# Altium PCB NU-SYNTHS_MIDICV_PANEL_8HP.PcbDoc
Units mm, origin at the board's own origin, x right, y up, seen from the top; angles counter-clockwise.
Board outline 40.3 x 128.5 mm, 2 copper layers (Top Layer, Bottom Layer), stack 1.55 mm thick; 91 components, 51 nets, 20 pads, 0 vias.
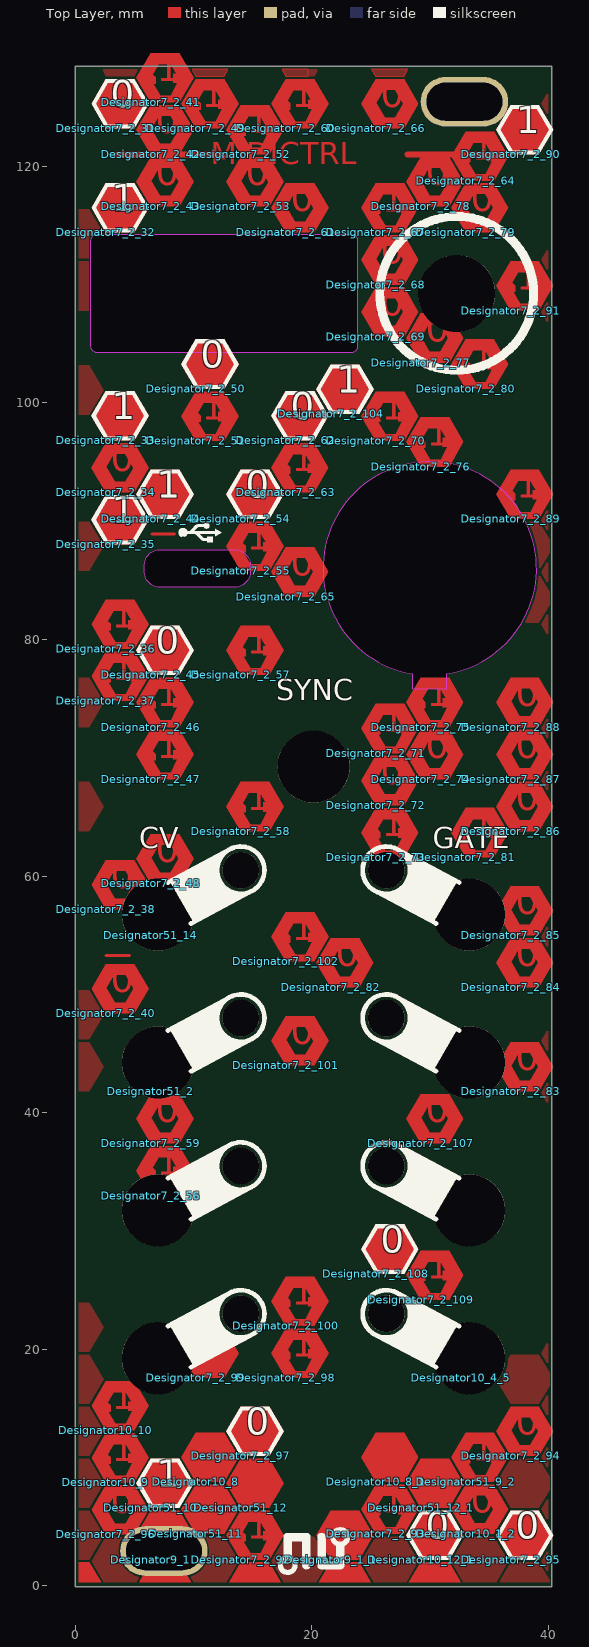
[diagram p0: Top Layer view]
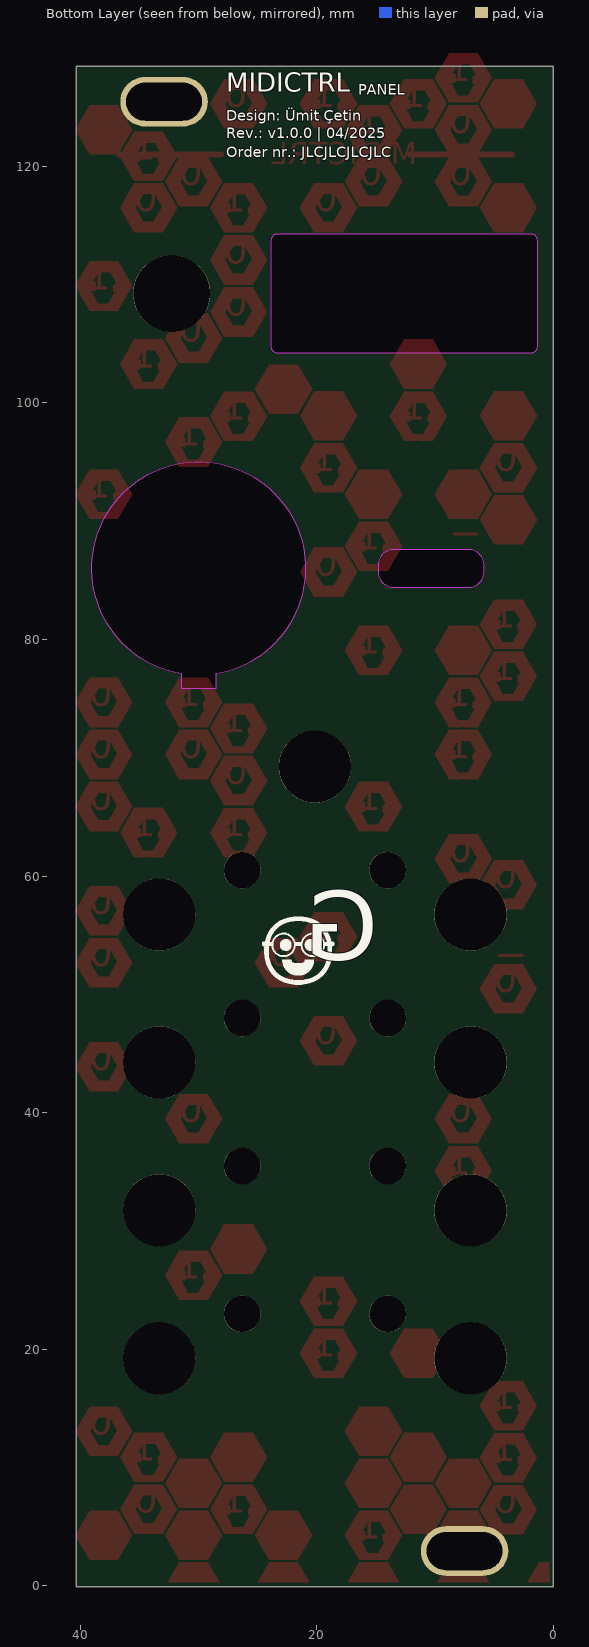
[diagram p1: Bottom Layer view, seen from below]

## Layer stack, top to bottom
Top Solder: solder mask 0.0127, Solder Resist, Dk 3.5
Top Layer: signal copper 0.025
Dielectric 1: dielectric 1.5, FR-4, Dk 4.8
Bottom Layer: signal copper 0.025
Bottom Solder: solder mask 0.0127, Solder Resist, Dk 3.5

## Board outline
0,-0.05 40.3,-0.05 40.3,128.45 0,128.45
cut-out: 28.512,75.85 31.412,75.85 31.412,77.09 ccw(c29.975,86) 28.512,77.094
cut-out: 7.135,84.42 cw(c7.135,85.7) 5.855,85.7 5.855,86.3 cw(c7.135,86.3) 7.135,87.58 13.515,87.58 cw(c13.515,86.3) 14.795,86.3 14.795,85.7 cw(c13.515,85.7) 13.515,84.42
cut-out: 1.835,104.246 cw(c1.835,104.746) 1.335,104.746 1.335,113.746 cw(c1.835,113.746) 1.835,114.246 23.365,114.246 cw(c23.365,113.746) 23.865,113.746 23.865,104.746 cw(c23.365,104.746) 23.365,104.246

## Design rules (kind name [scope] priority, off if disabled: settings)
BoardOutlineClearance [All] p1: gap=0.2 ignorepadtopadclearanceinfootprint=FALSE
Clearance [All] p1: gap=0.127 ignorepadtopadclearanceinfootprint=FALSE except(0.25: Arc-Hole Track-Hole SMDPad-Hole THPad-Hole Via-Hole Fill-Hole Poly-Hole Region-Hole Text-Hole)
ComponentClearance [All] p1: gap=0.127 collisioncheckmode=3 verticalgap=0.127 showdistances=TRUE
DiffPairsRouting [All] p1: maxlimit=0.254 minlimit=0.127 mostfreqgap=0.127 toplayer_minwidth=0.127 toplayer_maxwidth=25.4 toplayer_prefwidth=0.127 bottomlayer_minwidth=0.127 bottomlayer_maxwidth=25.4 bottomlayer_prefwidth=0.127 maxuncoupledlength=12.7
Height [All] p1: minheight=0 maxheight=1816.048 prefheight=12.7
HoleSize [All] p1: absolutevalues=TRUE maxlimit=6.3 minlimit=0.3 maxpercent=80.000 minpercent=20.000
HoleToHoleClearance [All] p1: gap=0.25 allowstackedmicrovias=FALSE
MinimumAnnularRing [All] p1: minimumring=0.076
MinimumSolderMaskSliver [All] p1: minsoldermaskwidth=0
PlaneClearance [All] p1: clearance=0.127
PlaneConnect PlaneConnectPowerPads [InPadClass('PowerPads')] p1: planeconnectstyle=Direct reliefexpansion=0.508 reliefentries=4 reliefconductorwidth=0.254 reliefairgap=0.254
PlaneConnect [All] p2: pad.planeconnectstyle=Relief pad.reliefexpansion=0.3 pad.reliefentries=4 pad.reliefconductorwidth=0.127 pad.reliefairgap=0.127 via.planeconnectstyle=Direct via.reliefexpansion=0.3 via.reliefentries=4 via.reliefconductorwidth=0.127 via.reliefairgap=0.127
PolygonConnect PolygonConnectPowerPads [All vs (InPadClass('PowerPads'))] p1: connectstyle=Direct reliefconductorwidth=0.254 reliefentries=4 polygonreliefangle="90 Angle" airgapwidth=0.254
PolygonConnect [All] p2: thpad.connectstyle=Relief thpad.reliefconductorwidth=0.2 thpad.reliefentries=4 thpad.polygonreliefangle="90 Angle" thpad.airgapwidth=0.127 smdpad.connectstyle=Relief smdpad.reliefconductorwidth=0.2 smdpad.reliefentries=4 smdpad.polygonreliefangle="90 Angle" smdpad.airgapwidth=0.127 via.connectstyle=Direct via.reliefconductorwidth=0.127 via.reliefentries=4 via.polygonreliefangle="90 Angle" via.airgapwidth=0.127
RoutingVias [All] p1: holewidth=0.3 width=0.6 viastyle="Through Hole" minholewidth=0.3 minwidth=0.6 maxholewidth=0.6 maxwidth=6.6
SilkToSilkClearance [All] p1: silktosilkclearance=0
SilkToSolderMaskClearance [IsPad] p1: minsilkscreentomaskgap=0.127 clearancetoexposedcopper=TRUE
SolderMaskExpansion [All] p1: expansion=0.075 istentingtop=FALSE
Width [All] p1: maxlimit=25.4 minlimit=0.127 preferedwidth=0.127 minimp=50.000000 maximp=50.000000 favimp=50.000000
20 further rules are at their usual default settings.

## Components (designator, comment, footprint, x,y, rotation, side; value= is the part's Value field where it differs from the comment)
Designator7_2_31 "Comment" "Copper - silk 0 - OUTline" 2.6,123.2 r0 top
Designator7_2_32 "Comment" "Copper - silk 1 - OUTline" 2.6,114.4 r0 top
Designator7_2_33 "Comment" "Copper - silk 1 - OUTline" 2.59,96.83 r0 top
Designator7_2_34 "Comment" "BINARY 0" 2.59,92.43 r0 top
Designator7_2_35 "Comment" "Copper - silk 1 - OUTline" 2.59,88.03 r0 top
Designator7_2_36 "Comment" "BINARY 1" 2.6,79.2 r0 top
Designator7_2_37 "Comment" "BINARY 1" 2.6,74.8 r0 top
Designator7_2_38 "Comment" "BINARY 0" 2.6,57.2 r0 top
Designator7_2_40 "Comment" "BINARY 0" 2.6,48.4 r0 top
Designator7_2_41 "Comment" "BINARY 1" 6.4,125.401 r0 top
Designator7_2_42 "Comment" "BINARY 0" 6.4,121.001 r0 top
Designator7_2_43 "Comment" "BINARY 0" 6.4,116.601 r0 top
Designator7_2_44 "Comment" "Copper - silk 1 - OUTline" 6.4,90.201 r0 top
Designator7_2_45 "Comment" "Copper - silk 0 - OUTline" 6.4,77.001 r0 top
Designator7_2_46 "Comment" "BINARY 1" 6.4,72.601 r0 top
Designator7_2_47 "Comment" "BINARY 1" 6.4,68.201 r0 top
Designator7_2_48 "Comment" "BINARY 0" 6.4,59.401 r0 top
Designator7_2_49 "Comment" "BINARY 1" 10.2,123.201 r0 top
Designator7_2_50 "Comment" "Copper - silk 0 - OUTline" 10.2,101.201 r0 top
Designator7_2_51 "Comment" "BINARY 1" 10.2,96.801 r0 top
Designator7_2_52 "Comment" "BINARY 1" 14,121.001 r0 top
Designator7_2_53 "Comment" "BINARY 0" 14,116.601 r0 top
Designator7_2_54 "Comment" "Copper - silk 0 - OUTline" 14,90.2 r0 top
Designator7_2_55 "Comment" "BINARY 1" 14,85.8 r0 top
Designator7_2_56 "Comment" "BINARY 1" 6.4,33.001 r0 top
Designator7_2_57 "Comment" "BINARY 1" 14,77.001 r0 top
Designator7_2_58 "Comment" "BINARY 1" 14,63.801 r0 top
Designator7_2_59 "Comment" "BINARY 0" 6.4,37.401 r0 top
Designator7_2_60 "Comment" "BINARY 1" 17.8,123.199 r0 top
Designator7_2_61 "Comment" "BINARY 0" 17.8,114.399 r0 top
Designator7_2_62 "Comment" "Copper - silk 0 - OUTline" 17.79,96.829 r0 top
Designator7_2_63 "Comment" "BINARY 1" 17.79,92.429 r0 top
Designator7_2_64 "Comment" "BINARY 1" 33.011,118.771 r0 top
Designator7_2_65 "Comment" "BINARY 0" 17.79,83.629 r0 top
Designator7_2_66 "Comment" "BINARY 0" 25.4,123.199 r0 top
Designator7_2_67 "Comment" "BINARY 1" 25.4,114.399 r0 top
Designator7_2_68 "Comment" "BINARY 0" 25.4,109.999 r0 top
Designator7_2_69 "Comment" "BINARY 0" 25.4,105.599 r0 top
Designator7_2_70 "Comment" "BINARY 1" 25.4,96.799 r0 top
Designator7_2_71 "Comment" "BINARY 1" 25.4,70.399 r0 top
Designator7_2_72 "Comment" "BINARY 0" 25.4,65.999 r0 top
Designator7_2_73 "Comment" "BINARY 1" 25.4,61.599 r0 top
Designator7_2_74 "Comment" "BINARY 0" 29.2,68.199 r0 top
Designator7_2_75 "Comment" "BINARY 1" 29.2,72.599 r0 top
Designator7_2_76 "Comment" "BINARY 1" 29.2,94.619 r0 top
Designator7_2_77 "Comment" "BINARY 0" 29.2,103.401 r0 top
Designator7_2_78 "Comment" "BINARY 0" 29.2,116.599 r0 top
Designator7_2_79 "Comment" "BINARY 0" 33,114.399 r0 top
Designator7_2_80 "Comment" "BINARY 1" 33,101.201 r0 top
Designator7_2_81 "Comment" "BINARY 1" 33,61.6 r0 top
Designator7_2_82 "Comment" "BINARY 0" 21.6,50.6 r0 top
Designator7_2_83 "Comment" "BINARY 0" 36.8,41.8 r0 top
Designator7_2_84 "Comment" "BINARY 0" 36.8,50.6 r0 top
Designator7_2_85 "Comment" "BINARY 0" 36.8,55 r0 top
Designator7_2_86 "Comment" "BINARY 0" 36.8,63.8 r0 top
Designator7_2_87 "Comment" "BINARY 0" 36.8,68.2 r0 top
Designator7_2_88 "Comment" "BINARY 0" 36.8,72.6 r0 top
Designator7_2_89 "Comment" "BINARY 1" 36.8,90.2 r0 top
Designator7_2_90 "Comment" "Copper - silk 1 - OUTline" 36.8,121 r0 top
Designator7_2_91 "Comment" "BINARY 1" 36.8,107.8 r0 top
Designator7_2_92 "Comment" "BINARY 1" 14,2.2 r0 top
Designator7_2_93 "Comment" "BINARY 1" 25.4,4.4 r0 top
Designator7_2_94 "Comment" "BINARY 0" 36.8,10.999 r0 top
Designator7_2_95 "Comment" "Copper - silk 0 - OUTline" 36.8,2.199 r0 top
Designator7_2_96 "Comment" "BINARY 0" 2.6,4.357 r0 top
Designator7_2_97 "Comment" "Copper - silk 0 - OUTline" 14,11.001 r0 top
Designator7_2_98 "Comment" "BINARY 1" 17.8,17.6 r0 top
Designator7_2_99 "Comment" Copper 10.2,17.6 r0 top
Designator7_2_100 "Comment" "BINARY 1" 17.8,22 r0 top
Designator7_2_101 "Comment" "BINARY 0" 17.8,44 r0 top
Designator7_2_102 "Comment" "BINARY 1" 17.8,52.8 r0 top
Designator7_2_104 "Comment" "Copper - silk 1 - OUTline" 21.605,99.065 r0 top
Designator7_2_107 "Comment" "BINARY 0" 29.2,37.401 r0 top
Designator7_2_108 "Comment" "Copper - silk 0 - OUTline" 25.4,26.4 r0 top
Designator7_2_109 "Comment" "BINARY 1" 29.2,24.199 r0 top
Designator9_1 "Comment" Copper 6.4,2.2 r0 top
Designator9_1_1 "Comment" Copper 21.6,2.2 r0 top
Designator10_1_2 "Comment" "BINARY 0" 33,4.399 r0 top
Designator10_4_5 "Comment" Copper 32.6,17.6 r0 top
Designator10_8 "Comment" Copper 10.2,8.8 r0 top
Designator10_8_1 "Comment" Copper 25.4,8.8 r0 top
Designator10_9 "Comment" "BINARY 1" 2.6,8.756 r0 top
Designator10_10 "Comment" "BINARY 1" 2.6,13.156 r0 top
Designator10_12_1 "Comment" "Copper - silk 0 - OUTline" 29.2,2.2 r0 top
Designator51_2 "Comment" Copper 6.4,41.8 r0 top
Designator51_9_2 "Comment" "BINARY 1" 33,8.799 r0 top
Designator51_10 "Comment" "Copper - silk 1 - OUTline" 6.4,6.6 r0 top
Designator51_11 "Comment" Copper 10.2,4.4 r0 top
Designator51_12 "Comment" Copper 14,6.6 r0 top
Designator51_12_1 "Comment" Copper 29.2,6.6 r0 top
Designator51_14 "Comment" Copper 6.4,55 r0 top

## Footprints (in the part's own frame and the unit in brackets; to place one, negate y for a bottom-side part, rotate by r counter-clockwise, add the part's x,y. Pads: shape width x height; smd on the part's side, far side on the other; paste and mask are expansions set on the pad)
"BINARY 0" [mm]
  Top Layer region: 1.2,4.156 0,4.156 -1.214,2.077 0,2.077
  Top Layer region: 1.3,0 0,0 -1.214,2.078 0.084,2.077
  Top Layer region: 1.2,0 2.4,0 3.614,2.078 2.35,2.1 1.2,0.125
  Top Layer region: 1.2,4.156 2.4,4.156 3.614,2.077 2.339,2.079 1.2,4.025
  Top Layer region: 0.641,3.262 1.684,3.262 1.684,4.154 0.651,4.154
  Top Layer region: 0.75,0.9 1.65,0.9 1.617,0.153 0.856,0.153 0.846,0.143
"BINARY 1" [mm]
  Top Layer region: 0.725,0 1.875,0 1.875,0.575 0.725,0.575
  Top Layer region: 0.641,3.225 1.684,3.225 1.684,4.154 0.651,4.154
  Top Layer region: 1.2,4.156 2.4,4.156 3.614,2.077 2.339,2.079 1.2,4.025
  Top Layer region: 1.409,0 2.4,0 3.614,2.078 2.455,2.078
  Top Layer region: 1.14,0 0,0 -1.214,2.078 -0.076,2.077
  Top Layer region: 1.2,4.156 0,4.156 -1.214,2.077 -0.016,2.079
  Top Layer region: -0.611,2.35 0.161,2.35 0.4,2.111 0.4,1.583 -0.6,1.583 -0.609,1.573
  Top Layer region: 1.889,2.425 2.661,2.425 2.9,2.186 2.9,1.658 1.9,1.658 1.891,1.648
Copper [mm]
  Top Layer region: 0,0 2.4,0 3.614,2.078 2.4,4.157 0,4.157 -1.214,2.078
"Copper - silk 0 - OUTline" [mm]
  Top Layer region: 0,0 2.4,0 3.614,2.078 2.4,4.157 0,4.157 -1.214,2.078
  silkscreen extent -1.21,0 3.61,4.16
"Copper - silk 1 - OUTline" [mm]
  Top Layer region: 0,0 2.4,0 3.614,2.078 2.4,4.157 0,4.157 -1.214,2.078
  silkscreen extent -1.21,0 3.61,4.16

## Free pads (board coordinates)
  round 6.1 hole 6.1 unplated: ""(7,19.25) ""(7,31.75) ""(7,44.25) ""(7,56.75) ""(20.15,69.25) ""(33.3,19.25) ""(33.3,31.75) ""(33.3,44.25) ""(33.3,56.75)
  oval 7.4x4.2 hole 3.2 slot 6.4 at 0 deg: ""(7.5,2.95) ""(32.9,125.45)
  round 3.1 hole 3.1 unplated: ""(14,23) ""(14,35.5) ""(14,48) ""(14,60.5) ""(26.3,23) ""(26.3,35.5) ""(26.3,48) ""(26.3,60.5)
  round 6.5 hole 6.5 unplated: ""(32.25,109.25)

## Nets (pads, with @x,y where several pads share a name; then routed paths per layer and width w, separated by ;. In a path a pad name is that pad's centre, name@x,y a point inside that pad or via, vN(x,y) a via of type N, cw(c..) or ccw(c..) an arc to the next point about the centre after c; other vN are vias at no path point)
+12V: 
-12V: 
CONN_VN12: 
CONN_VP12: 
GND: 
NetC1_1: 
NetC1_2: 
NetC2_1: 
NetC3_1: 
NetC3_2: 
NetC4_2: 
NetC5_1: 
NetC5_2: 
NetC6_1: 
NetC6_2: 
NetC7_2: 
NetC8_2: 
NetD2_1: 
NetD2_2: 
NetD4_1: 
NetD4_2: 
NetD6_1: 
NetD7_2: 
NetD8_2: 
NetD10_2: 
NetD11_1: 
NetQ1_1: 
NetQ1_3: 
NetQ2_1: 
NetQ3_1: 
NetQ4_1: 
NetQ7_1: 
NetQ7_3: 
NetQ8_1: 
NetR2_1: 
NetR3_1: 
NetR10_1: 
NetR12_1: 
NetR13_1: 
NetR14_1: 
NetR15_1: 
NetR15_2: 
NetR16_1: 
NetR17_1: 
NetR21_2: 
NetR21_3: 
NetR23_1: 
NetR23_2: 
NetR24_1: 
NetR24_2: 
NetR26_2: 
copper on no net: | length 21.1
  Top Layer w0.254: 2.6,53.3 4.6,53.3 ; 6.5,88.9 8.4,88.9
  Top Layer w0.5: 3.5,121 12.1,121 ; 28.1,121 36.7,121

## Polygon pours and split planes (outlines as drawn)
no net on Top Layer "NONET_L01_P109" (solid, pour order 109): 35.586,17.477 36.193,18.516 36.8,19.556 39.2,19.556 39.807,18.516 40.414,17.477 39.807,16.438 39.2,15.399 36.8,15.399
no net on Top Layer "NONET_L01_P100" (solid, pour order 100): 35.807,0.299 36.8,1.999 39.2,1.999 40.193,0.299
no net on Top Layer "NONET_L01_P099" (solid, pour order 99): 1.386,2.078 2.6,4.157 5,4.157 6.214,2.079 5.176,0.301 2.424,0.301
no net on Top Layer "NONET_L01_P098" (solid, pour order 98): 8.986,2.078 10.2,4.157 12.6,4.157 13.814,2.079 12.776,0.301 10.024,0.301
no net on Top Layer "NONET_L01_P097" (solid, pour order 97): 16.586,2.078 17.8,4.157 20.2,4.157 21.414,2.078 20.376,0.301 17.624,0.301
no net on Top Layer "NONET_L01_P096" (solid, pour order 96): 24.186,2.078 25.4,4.157 27.8,4.157 29.014,2.078 27.976,0.301 25.224,0.301
no net on Top Layer "NONET_L01_P095" (solid, pour order 95): 31.786,2.077 33,4.156 35.4,4.156 36.614,2.078 35.576,0.3 32.824,0.3
no net on Top Layer "NONET_L01_P094" (solid, pour order 94): 39.386,41.677 39.993,42.717 39.993,40.638
no net on Top Layer "NONET_L01_P092" (solid, pour order 92): 39.386,2.077 39.993,3.116 39.993,1.038
no net on Top Layer "NONET_L01_P091" (solid, pour order 91): 35.586,8.677 36.193,9.716 36.8,10.756 39.2,10.756 39.807,9.716 40.414,8.677 39.807,7.638 39.2,6.599 36.8,6.599
no net on Top Layer "NONET_L01_P090" (solid, pour order 90): 39.386,6.477 39.993,7.516 39.993,5.438
no net on Top Layer "NONET_L01_P088" (solid, pour order 88): 39.386,10.877 39.993,11.916 39.993,9.838
no net on Top Layer "NONET_L01_P086" (solid, pour order 86): 39.386,15.277 39.993,16.316 39.993,14.238
no net on Top Layer "NONET_L01_P084" (solid, pour order 84): 39.386,19.677 39.993,20.716 39.993,18.638
no net on Top Layer "NONET_L01_P075" (solid, pour order 75): 39.386,125.277 39.993,126.317 39.993,124.238
no net on Top Layer "NONET_L01_P069" (solid, pour order 69): 39.386,112.077 39.993,113.117 39.993,111.038
no net on Top Layer "NONET_L01_P067" (solid, pour order 67): 39.386,107.677 39.993,108.717 39.993,106.638
no net on Top Layer "NONET_L01_P059" (solid, pour order 59): 39.386,90.077 39.993,91.117 39.993,89.038
no net on Top Layer "NONET_L01_P058" (solid, pour order 58): 35.586,87.877 36.193,88.917 36.8,89.956 39.2,89.956 39.807,88.917 40.414,87.878 39.807,86.838 39.2,85.799 36.8,85.799
no net on Top Layer "NONET_L01_P057" (solid, pour order 57): 39.386,85.677 39.993,86.717 39.993,84.638
no net on Top Layer "NONET_L01_P056" (solid, pour order 56): 35.586,83.477 36.193,84.517 36.8,85.556 39.2,85.556 39.807,84.517 40.414,83.478 39.807,82.438 39.2,81.399 36.8,81.399
no net on Top Layer "NONET_L01_P055" (solid, pour order 55): 39.386,81.277 39.993,82.317 39.993,80.238
no net on Top Layer "NONET_L01_P051" (solid, pour order 51): 39.386,72.477 39.993,73.517 39.993,71.438
no net on Top Layer "NONET_L01_P049" (solid, pour order 49): 39.386,68.077 39.993,69.117 39.993,67.038
no net on Top Layer "NONET_L01_P043" (solid, pour order 43): 39.386,54.877 39.993,55.917 39.993,53.838
no net on Top Layer "NONET_L01_P039" (solid, pour order 39): 39.386,46.077 39.993,47.117 39.993,45.038
no net on Top Layer "NONET_L01_P037" (solid, pour order 37): 25.4,127.6 27.8,127.6 28.152,128.199 25.048,128.199
no net on Top Layer "NONET_L01_P036" (solid, pour order 36): 10.2,127.6 12.6,127.6 12.952,128.2 9.848,128.2
no net on Top Layer "NONET_L01_P034" (solid, pour order 34): 25.4,127.6 27.8,127.6 28.152,128.199 25.048,128.199
no net on Top Layer "NONET_L01_P033" (solid, pour order 33): 17.8,127.6 20.2,127.6 20.552,128.199 17.448,128.199
no net on Top Layer "NONET_L01_P031" (solid, pour order 31): 0.3,112.2 1.2,112.2 2.414,114.278 1.2,116.357 0.3,116.357
no net on Top Layer "NONET_L01_P029" (solid, pour order 29): 0.3,63.8 1.2,63.8 2.414,65.878 1.2,67.957 0.3,67.957
no net on Top Layer "NONET_L01_P027" (solid, pour order 27): 0.3,72.6 1.2,72.6 2.414,74.678 1.2,76.757 0.3,76.757
no net on Top Layer "NONET_L01_P024" (solid, pour order 24): 0.3,85.8 1.2,85.8 2.414,87.878 1.2,89.957 0.3,89.957
no net on Top Layer "NONET_L01_P021" (solid, pour order 21): 0.3,99 1.2,99 2.414,101.078 1.2,103.157 0.3,103.157
no net on Top Layer "NONET_L01_P017" (solid, pour order 17): 0.3,41.8 1.2,41.8 2.414,43.878 1.2,45.957 0.3,45.957
no net on Top Layer "NONET_L01_P016" (solid, pour order 16): 0.3,46.2 1.2,46.2 2.414,48.278 1.2,50.357 0.3,50.357
no net on Top Layer "NONET_L01_P014" (solid, pour order 14): 0.3,2.2 1.2,2.2 2.414,4.278 1.2,6.357 0.3,6.357
no net on Top Layer "NONET_L01_P013" (solid, pour order 13): 0.3,6.6 1.2,6.6 2.414,8.678 1.2,10.757 0.3,10.757
no net on Top Layer "NONET_L01_P012" (solid, pour order 12): 0.3,11 1.2,11 2.414,13.078 1.2,15.157 0.3,15.157
no net on Top Layer "NONET_L01_P011" (solid, pour order 11): 10.2,127.6 12.6,127.6 12.952,128.2 9.848,128.2
no net on Top Layer "NONET_L01_P010" (solid, pour order 10): 2.6,127.6 5,127.6 5.352,128.2 2.248,128.2
no net on Top Layer "NONET_L01_P006" (solid, pour order 6): 0.3,107.8 1.2,107.8 2.414,109.878 1.2,111.957 0.3,111.957
no net on Top Layer "NONET_L01_P003" (solid, pour order 3): 0.3,19.8 1.2,19.8 2.414,21.879 1.2,23.957 0.3,23.957
no net on Top Layer "NONET_L01_P001" (solid, pour order 1): 0.3,15.4 1.2,15.4 2.414,17.478 1.2,19.557 0.3,19.557
no net on Top Layer "NONET_L01_P000" (solid, pour order 0): 17.8,127.6 19.7,127.6 19.7,128.2 17.448,128.2
no net on Top Overlay "NONET_L-01_P-001" (solid): 32.235,47.008 29.575,48.525 28.2,49.225 28.2,47.15 26.325,45.775 27.863,45.038 30.26,43.584
no net on Top Overlay "NONET_L-01_P-001" (solid): 8.065,22.008 10.725,23.525 12.1,24.225 12.1,22.15 13.975,20.775 12.437,20.038 10.04,18.584
no net on Top Overlay "NONET_L-01_P-001" (solid): 8.065,59.508 10.725,61.025 12.1,61.725 12.1,59.65 13.975,58.275 12.437,57.538 10.04,56.084
no net on Top Overlay "NONET_L-01_P-001" (solid): 8.065,34.508 10.725,36.025 12.1,36.725 12.1,34.65 13.975,33.275 12.437,32.538 10.04,31.084
no net on Top Overlay "NONET_L-01_P-001" (solid): 32.235,34.508 29.575,36.025 28.2,36.725 28.2,34.65 26.325,33.275 27.863,32.538 30.26,31.084
no net on Top Overlay "NONET_L-01_P-001" (solid): 8.065,47.008 10.725,48.525 12.1,49.225 12.1,47.15 13.975,45.775 12.437,45.038 10.04,43.584
no net on Top Overlay "NONET_L-01_P-001" (solid): 32.235,59.508 29.575,61.025 28.2,61.725 28.2,59.65 26.325,58.275 27.863,57.538 30.26,56.084
no net on Top Overlay "NONET_L-01_P-001" (solid): 32.235,22.008 29.575,23.525 28.2,24.225 28.2,22.15 26.325,20.775 27.863,20.038 30.26,18.584

## Other copper
Top Layer:
  region: 14,2 13.007,0.3 17.393,0.3 16.4,2
  region: 0.326,2 0.3,0.3 2.2,0.3 1.207,2
  region: 21.6,2 20.607,0.299 24.993,0.299 24,2
  region: 29.2,2 28.207,0.299 32.593,0.299 31.6,2
  region: 6.4,2 5.407,0.3 9.793,0.3 8.8,2
  text "MIDICTRL" at 11.481,119.536 h3.2

## Silkscreen, mask and mechanical layers (free items; w line width, h text height)
Top Overlay:
  drawing of 28 lines, arcs and shapes, not listed
  text "SYNC" at 16.993,74.275 h3
  text "CV" at 5.424,61.775 h3
  text "GATE" at 30.217,61.775 h3
Bottom Overlay:
  drawing of 4 lines, arcs and shapes, not listed
  text "PANEL" at 16.5,125.749 h1.52
  text "MIDICTRL" at 27.65,125.748 h2.75
  text "Design: Ümit Çetin" at 27.65,123.533 h1.52
  text "Rev.: v1.0.0 | 04/2025" at 27.649,122.076 h1.52
  text "Order nr.: JLCJLCJLCJLC" at 27.649,120.481 h1.52
  text "G" at 14.787,51.048 h10
Top Solder:
  lines w0.5: 3.5,121 12.1,121 ; 28.1,121 36.7,121
  text "MIDICTRL" at 13.985,119.826 h3.2
Mechanical 1:
  lines w0.05: 28.512,75.85 28.512,77.094 cw(c29.975,86) 31.412,77.09 31.412,75.85 28.512,75.85
  lines w0.254: 0,-0.05 40.3,-0.05 40.3,128.45 0,128.45 0,-0.05
  text ".Pcb_File_Name_No_Path" at 0,128.721 h1.52

## Dimensions
40.287,-0.047 to 40.287,128.453 on Mechanical 15
-0.013,128.453 to 40.287,128.453 on Mechanical 15

## Text inside footprints (layer, text, board x,y; h text height)
Designator7_2_31: Top Overlay "0" at 3.029,124.215 h3.9
Designator7_2_32: Top Overlay "1" at 3.102,115.411 h3.9
Designator7_2_33: Top Overlay "1" at 3.092,97.841 h3.9
Designator7_2_34: Top Layer "0" at 3.019,93.445 h3.9
Designator7_2_35: Top Overlay "1" at 3.092,89.041 h3.9
Designator7_2_36: Top Layer "1" at 3.102,80.211 h3.9
Designator7_2_37: Top Layer "1" at 3.102,75.811 h3.9
Designator7_2_38: Top Layer "0" at 3.029,58.215 h3.9
Designator7_2_40: Top Layer "0" at 3.029,49.415 h3.9
Designator7_2_41: Top Layer "1" at 6.902,126.412 h3.9
Designator7_2_42: Top Layer "0" at 6.829,122.016 h3.9
Designator7_2_43: Top Layer "0" at 6.829,117.616 h3.9
Designator7_2_44: Top Overlay "1" at 6.902,91.212 h3.9
Designator7_2_45: Top Overlay "0" at 6.829,78.016 h3.9
Designator7_2_46: Top Layer "1" at 6.902,73.612 h3.9
Designator7_2_47: Top Layer "1" at 6.902,69.212 h3.9
Designator7_2_48: Top Layer "0" at 6.829,60.416 h3.9
Designator7_2_49: Top Layer "1" at 10.702,124.212 h3.9
Designator7_2_50: Top Overlay "0" at 10.629,102.216 h3.9
Designator7_2_51: Top Layer "1" at 10.702,97.812 h3.9
Designator7_2_52: Top Layer "1" at 14.502,122.012 h3.9
Designator7_2_53: Top Layer "0" at 14.429,117.616 h3.9
Designator7_2_54: Top Overlay "0" at 14.429,91.216 h3.9
Designator7_2_55: Top Layer "1" at 14.502,86.812 h3.9
Designator7_2_56: Top Layer "1" at 6.902,34.012 h3.9
Designator7_2_57: Top Layer "1" at 14.502,78.012 h3.9
Designator7_2_58: Top Layer "1" at 14.502,64.812 h3.9
Designator7_2_59: Top Layer "0" at 6.829,38.416 h3.9
Designator7_2_60: Top Layer "1" at 18.302,124.211 h3.9
Designator7_2_61: Top Layer "0" at 18.229,115.415 h3.9
Designator7_2_62: Top Overlay "0" at 18.219,97.845 h3.9
Designator7_2_63: Top Layer "1" at 18.292,93.441 h3.9
Designator7_2_64: Top Layer "1" at 33.512,119.782 h3.9
Designator7_2_65: Top Layer "0" at 18.219,84.644 h3.9
Designator7_2_66: Top Layer "0" at 25.829,124.215 h3.9
Designator7_2_67: Top Layer "1" at 25.902,115.411 h3.9
Designator7_2_68: Top Layer "0" at 25.829,111.015 h3.9
Designator7_2_69: Top Layer "0" at 25.829,106.615 h3.9
Designator7_2_70: Top Layer "1" at 25.902,97.811 h3.9
Designator7_2_71: Top Layer "1" at 25.902,71.411 h3.9
Designator7_2_72: Top Layer "0" at 25.829,67.015 h3.9
Designator7_2_73: Top Layer "1" at 25.902,62.611 h3.9
Designator7_2_74: Top Layer "0" at 29.629,69.215 h3.9
Designator7_2_75: Top Layer "1" at 29.702,73.611 h3.9
Designator7_2_76: Top Layer "1" at 29.702,95.63 h3.9
Designator7_2_77: Top Layer "0" at 29.629,104.416 h3.9
Designator7_2_78: Top Layer "0" at 29.629,117.614 h3.9
Designator7_2_79: Top Layer "0" at 33.429,115.414 h3.9
Designator7_2_80: Top Layer "1" at 33.502,102.212 h3.9
Designator7_2_81: Top Layer "1" at 33.502,62.611 h3.9
Designator7_2_82: Top Layer "0" at 22.029,51.615 h3.9
Designator7_2_83: Top Layer "0" at 37.229,42.815 h3.9
Designator7_2_84: Top Layer "0" at 37.229,51.615 h3.9
Designator7_2_85: Top Layer "0" at 37.229,56.015 h3.9
Designator7_2_86: Top Layer "0" at 37.229,64.815 h3.9
Designator7_2_87: Top Layer "0" at 37.229,69.215 h3.9
Designator7_2_88: Top Layer "0" at 37.229,73.615 h3.9
Designator7_2_89: Top Layer "1" at 37.302,91.212 h3.9
Designator7_2_90: Top Overlay "1" at 37.302,122.011 h3.9
Designator7_2_91: Top Layer "1" at 37.302,108.812 h3.9
Designator7_2_92: Top Layer "1" at 14.502,3.211 h3.9
Designator7_2_93: Top Layer "1" at 25.902,5.411 h3.9
Designator7_2_94: Top Layer "0" at 37.229,12.014 h3.9
Designator7_2_95: Top Overlay "0" at 37.229,3.214 h3.9
Designator7_2_96: Top Layer "0" at 3.029,5.372 h3.9
Designator7_2_97: Top Overlay "0" at 14.429,12.016 h3.9
Designator7_2_98: Top Layer "1" at 18.302,18.611 h3.9
Designator7_2_100: Top Layer "1" at 18.302,23.011 h3.9
Designator7_2_101: Top Layer "0" at 18.229,45.015 h3.9
Designator7_2_102: Top Layer "1" at 18.302,53.811 h3.9
Designator7_2_104: Top Overlay "1" at 22.107,100.076 h3.9
Designator7_2_107: Top Layer "0" at 29.629,38.416 h3.9
Designator7_2_108: Top Overlay "0" at 25.829,27.415 h3.9
Designator7_2_109: Top Layer "1" at 29.702,25.21 h3.9
Designator10_1_2: Top Layer "0" at 33.429,5.414 h3.9
Designator10_9: Top Layer "1" at 3.102,9.767 h3.9
Designator10_10: Top Layer "1" at 3.102,14.167 h3.9
Designator10_12_1: Top Overlay "0" at 29.629,3.215 h3.9
Designator51_9_2: Top Layer "1" at 33.502,9.81 h3.9
Designator51_10: Top Overlay "1" at 6.902,7.611 h3.9